# Altium PCB PCB1.PcbDoc
Units mil, origin at the board's own origin, x right, y up, seen from the top; angles counter-clockwise.
Board outline 5340 x 3480 mil, 2 copper layers (Top Layer, Bottom Layer); 76 components, 74 nets, 280 pads, 33 vias.
Unrouted connection lines stored in the file: 3.
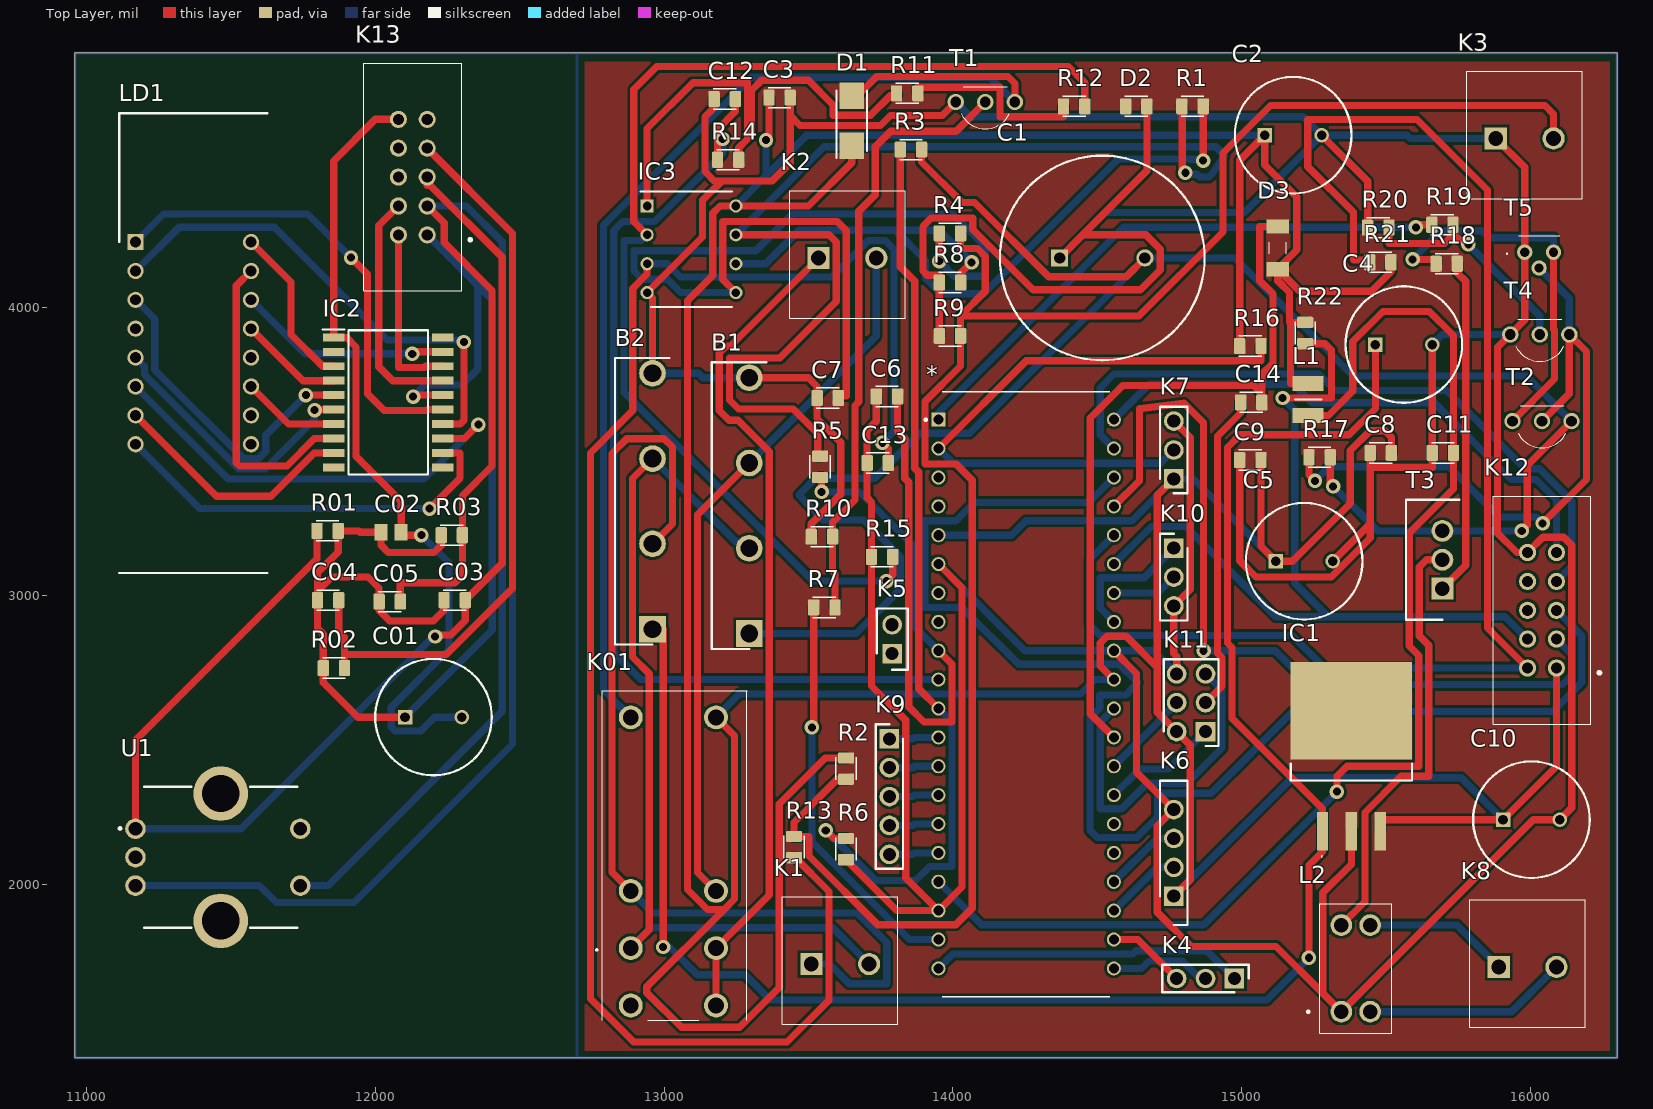
[diagram p0: Top Layer view]
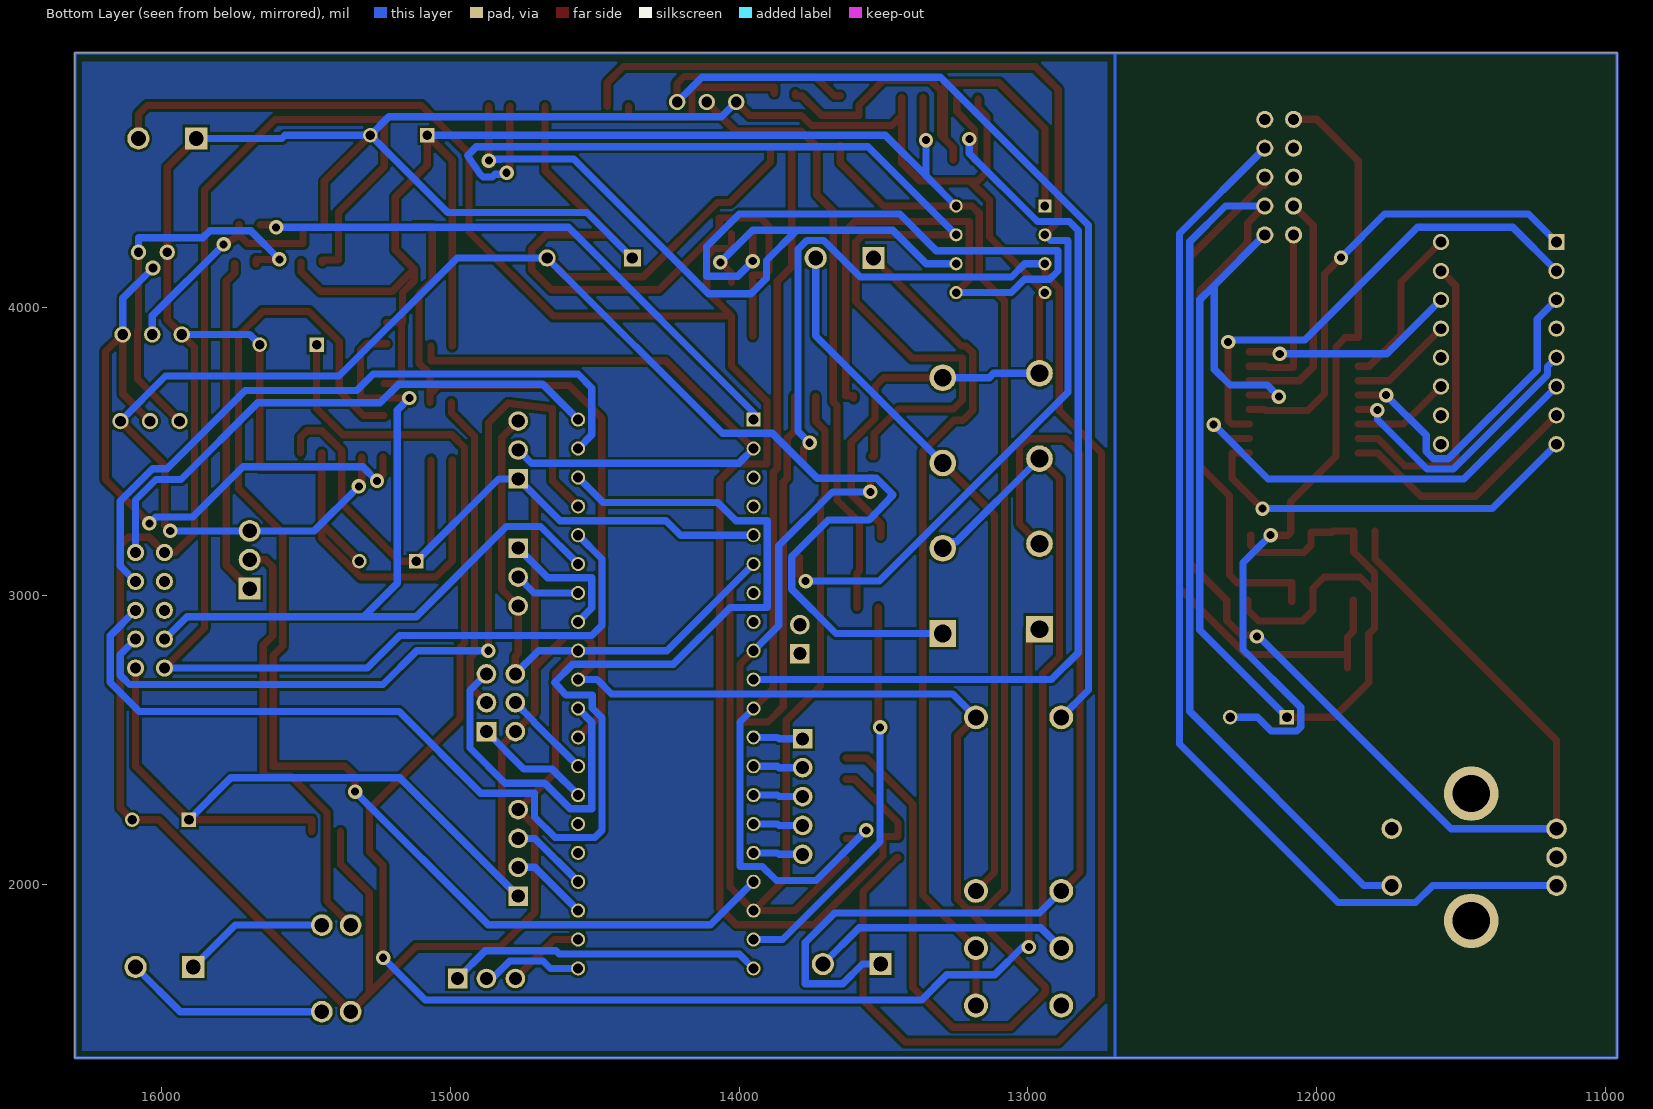
[diagram p1: Bottom Layer view, seen from below]

## Layer stack, top to bottom
Top Solder: solder mask 0.4, Solder Resist, Dk 3.5
Top Layer: signal copper 1.4
Dielectric 1: dielectric 12.6, FR-4, Dk 4.8
Bottom Layer: signal copper 1.4
Bottom Solder: solder mask 0.4, Solder Resist, Dk 3.5

## Board outline
10960,1400 10960,4880 16300,4880 16300,1400
board region "Layer Stack Region 1": 12640,4880 16300,4880 16300,1400 12640,1400
board region "Layer Stack Region 1": 12640,1400 10960,1400 10960,4880 12640,4880

## Design rules (kind name [scope] priority, off if disabled: settings)
Clearance [All] p1: gap=10 ignorepadtopadclearanceinfootprint=FALSE except(0: Arc-Hole Track-Hole SMDPad-Hole THPad-Hole Via-Hole Fill-Hole Poly-Hole Region-Hole Text-Hole)
PolygonConnect [All] p1: connectstyle=Relief reliefconductorwidth=10 reliefentries=4 polygonreliefangle="90 Angle" airgapwidth=10
RoutingVias [All] p1: holewidth=28 width=50 viastyle="Through Hole" minholewidth=28 minwidth=50 maxholewidth=28 maxwidth=50
SolderMaskExpansion [All] p1: expansion=4 istentingtop=FALSE
Width [All] p1: maxlimit=25 minlimit=25 preferedwidth=25 minimp=50.000000 maximp=50.000000 favimp=50.000000
30 further rules are at their usual default settings.

## Classes and differential pairs
component class power: B1 B2 C1 C4 C5 D1 D2 IC1 K01 K1 K2 R3 R6 R7 R10 T1
component class ic: C3 C6 C7 C12 C13 IC3 K3 K8 L2 R1 R2 R4 R5 R8 R9 R11 R12 R13 R14 R15 R17 R18 R19 R20 T2 T3 T4 T5
component class Display: C01 C02 C03 C04 C05 IC2 K13 LD1 R01 R02 R03 U1
component class "cpu sheet": * C8 C9 C10 C11 C14 D3 K4 K5 K6 K7 K9 K10 K11 K12 L1 R16 R21 R22

## Components (designator, comment, footprint, x,y, rotation, side; value= is the part's Value field where it differs from the comment)
* "ATMEGA4809-PF" DIP1543W47P254L5321H635Q40 14253.75,2660 r0 top
B1 "KBJ608G" TO750P480X2500X1900-4P 13295,2869.45 r90 top
B2 "KBJ608G" TO750P480X2500X1900-4P 12960,2884.72 r90 top
C1 "4700µ 50V" CAPPRD750W82D1800H4300 14369.72,4170 r0 top
C01 "100µ 50V" CAPPRD500W65D1025H1250 12103.15,2580 r0 top
C2 "10µ 50V" CAPPRD500W65D1025H1250 15080,4595 r0 top
C02 "100nF" *CAPC2012X94N 12055,3220 r180 top
C3 "100n" LIBRARYSOURCE=Vault 13400,4725 r0 top
C03 "10n" LIBRARYSOURCE=Vault 12275,2985 r180 top
C4 "100µ 25V" CAPPRD500W65D1025H1250 15463.15,3870 r0 top
C04 "10n" LIBRARYSOURCE=Vault 11836.81,2985 r180 top
C5 "10µ 50V" CAPPRD500W65D1025H1250 15118.15,3120 r0 top
C05 "10n" LIBRARYSOURCE=Vault 12050,2980 r180 top
C6 "10n" LIBRARYSOURCE=Vault 13771.81,3690 r0 top
C7 "10n" LIBRARYSOURCE=Vault 13566.81,3685 r0 top
C8 "100n" LIBRARYSOURCE=Vault 15481.81,3495 r0 top
C9 "100n" LIBRARYSOURCE=Vault 15030,3470 r0 top
C10 "10µ 50V" CAPPRD500W65D1025H1250 15905,2225 r0 top
C11 "100n" LIBRARYSOURCE=Vault 15696.81,3495 r0 top
C12 "10n" LIBRARYSOURCE=Vault 13210,4720 r0 top
C13 "10n" LIBRARYSOURCE=Vault 13740,3460 r0 top
C14 "100n" LIBRARYSOURCE=Vault 15033.19,3670 r0 top
D1 "1N4007" DIOM5327X242N 13650,4645 r90 top
D2 "5V1" LIBRARYSOURCE=Vault 14635,4695 r0 top
D3 "1N4148BUR" 1N4148BUR 15125,4205 r90 top
IC1 "TL780-05CKTTR" TL78005CKTTR 15380,2450 r0 top
IC2 "TM1637__SOP_" SOIC127P1045X280-20N 12045,3670 r0 top
IC3 "MCP6002-E_P" DIP781W56P254L950H533Q8N 13095,4200 r0 top
K01 "RT424615" RT424615 12884.72,2579.21 r270 top
K1 "1711725" 1711725 13510,1725 r0 top
K2 "1711725" 1711725 13535,4170 r0 top
K3 "1711725" 1711725 15880,4583.79 r0 top
K4 "10129378-903001BLF" HDRV3W67P0X254_1X3_762X241X858P 14975,1675 r180 top
K5 "10129378-902001BLF" HDRV2W67P0X254_1X2_508X241X843P 13790,2800 r90 top
K6 "UART2" HDRV4W67P0X254_1X4_1270X241X858P 14765,1960 r90 top
K7 "10129378-903001BLF" HDRV3W67P0X254_1X3_762X241X858P 14765,3405 r90 top
K8 "1711725" 1711725 15890,1715 r0 top
K9 "10129378-905001BLF" HDRV5W67P0X254_1X5_1270X241X858P 13780,2505 r270 top
K10 "UART0" HDRV3W67P0X254_1X3_762X241X858P 14765,3165 r270 top
K11 "10129381-906002BLF" HDRV6W67P254_2X3_762X483X858P 14875,2530 r90 top
K12 "N2510-6002RB-WD" N25106002RBWD 16090,2750 r90 top
K13 "N2510-6002RB-WD" N25106002RBWD 12180,4250 r90 top
L1 "CBC3225T100MR" INDC3225X270N 15230,3680 r90 top
L2 "CM2545X171B-10" CM2545X171B10 15345,1560 r0 top
LD1 "TDCG1050M" DIPS1016W75P254L4020H725Q16N 11170,4225 r0 top
R1 "CRCW08050000Z0EA" RESC2012X65N 14830,4695 r0 top
R01 "CRCW08050000Z0EA" RESC2012X65N 11835,3225 r0 top
R2 "CRCW08050000Z0EA" RESC2012X65N 13630,2401.81 r90 top
R02 "CRCW08050000Z0EA" RESC2012X65N 11856.81,2750 r180 top
R3 "CRCW08050000Z0EA" RESC2012X65N 13855,4545 r0 top
R03 "CRCW08050000Z0EA" RESC2012X65N 12265,3210 r180 top
R4 "CRCW08050000Z0EA" RESC2012X65N 13990,4255 r0 top
R5 "CRCW08050000Z0EA" RESC2012X65N 13540,3446.81 r90 top
R6 "CRCW08050000Z0EA" RESC2012X65N 13630,2123.19 r90 top
R7 "CRCW08050000Z0EA" RESC2012X65N 13555,2960 r0 top
R8 "CRCW08050000Z0EA" RESC2012X65N 13990,4085 r0 top
R9 "CRCW08050000Z0EA" RESC2012X65N 13990,3900 r0 top
R10 "CRCW08050000Z0EA" RESC2012X65N 13546.81,3205 r0 top
R11 "CRCW08050000Z0EA" RESC2012X65N 13841.81,4740 r0 top
R12 "CRCW08050000Z0EA" RESC2012X65N 14420,4695 r0 top
R13 "CRCW08050000Z0EA" RESC2012X65N 13450,2130 r90 top
R14 "CRCW08050000Z0EA" RESC2012X65N 13221.81,4510 r0 top
R15 "CRCW08050000Z0EA" RESC2012X65N 13755,3135 r0 top
R16 "CRCW08050000Z0EA" RESC2012X65N 15030,3865 r0 top
R17 "CRCW08050000Z0EA" RESC2012X65N 15270,3480 r0 top
R18 "CRCW08050000Z0EA" RESC2012X65N 15710,4150 r0 top
R19 "CRCW08050000Z0EA" RESC2012X65N 15695,4285 r0 top
R20 "CRCW08050000Z0EA" RESC2012X65N 15473.19,4275 r180 top
R21 "CRCW08050000Z0EA" RESC2012X65N 15480,4155 r0 top
R22 "CRCW08050000Z0EA" RESC2012X65N 15220,3910 r90 top
T1 "BC547ATA" TO-92_(TO-226) 14214.73,4710 r0 top
T2 "BC547ATA" TO-92_(TO-226) 16142.36,3605 r0 top
T3 "IRF9Z34NPBF" TO254P469X1042X1967-3P 15695,3025 r90 top
T4 "BC547ATA" TO-92_(TO-226) 16134.72,3905 r0 top
T5 "BC557C" BC557C 15980,4185 r0 top
U1 "PEC11R-4225F-S0024" PEC12R-4XXXF-SXXXX_1 11465,2095 r270 top

## Footprints (in the part's own frame and the unit in brackets; to place one, negate y for a bottom-side part, rotate by r counter-clockwise, add the part's x,y. Pads: shape width x height; smd on the part's side, far side on the other; paste and mask are expansions set on the pad)
1N4148BUR [mm]
  rect 1.25x2 smd: 1(-1.875,0) 2(1.875,0)
  silkscreen extent -0.5,-0.75 0.5,0.75
1711725 [mm]
  rect 1.95x1.95 hole 1.3: 1(0,0)
  round 1.95 hole 1.3: 2(5.08,0)
  silkscreen extent -2.54,-5.3 7.62,5.9, body extent -3.12,-5.3 7.61,5.9, height 18.41
*CAPC2012X94N [mm]
  rect 1.16x1.47 smd: 1(-0.88,0) 2(0.88,0)
BC557C [mm]
  round 1.35 hole 0.81: 1(0,0.127) 2(1.27,-1.27) 3(2.54,0.127)
  silkscreen extent -1.6,-0.05 3.07,1.55
CAPPRD500W65D1025H1250 [mm]
  rect 1.275x1.275 hole 0.85: 1(0,0)
  round 1.275 hole 0.85: 2(5,0)
  silkscreen extent -2.63,-5.12 7.63,5.12, body extent -2.75,-5.25 7.75,5.25, height 12.5
CAPPRD750W82D1800H4300 [mm]
  rect 1.5x1.5 hole 1: 1(0,0)
  round 1.5 hole 1: 2(7.5,0)
  silkscreen extent -5.25,-9 12.75,9, body extent -5.5,-9.25 13,9.25, height 43
CM2545X171B10 [mil]
  round 75 hole 50: 1(0,0) 2(100,0) 3(100,300) 4(0,300)
  silkscreen extent -118,-74 174,374, body extent -74,-74 174,374, height 378
DIOM5327X242N [mm]
  rect 2.3x2.15 smd: 1(-2.2,0) 2(2.2,0)
  silkscreen extent -3.27,-1.34 2.65,1.34, body extent -2.65,-1.34 2.65,1.34, height 2.42
DIP781W56P254L950H533Q8N [mm]
  rect 1.158x1.158 hole 0.758: 1(-3.905,3.81)
  round 1.158 hole 0.758: 2(-3.905,1.27) 3(-3.905,-1.27) 4(-3.905,-3.81) 5(3.905,-3.81) 6(3.905,-1.27) 7(3.905,1.27) 8(3.905,3.81)
  silkscreen extent -4.48,-5.08 3.56,5.08, body extent -4.04,-4.75 4.04,4.75, height 5.33
DIP1543W47P254L5321H635Q40 [mm]
  rect 1.24x1.24 hole 0.89: 1(-7.715,24.13)
  round 1.24 hole 0.89: 2(-7.715,21.59) 3(-7.715,19.05) 4(-7.715,16.51) 5(-7.715,13.97) 6(-7.715,11.43) 7(-7.715,8.89) 8(-7.715,6.35) 9(-7.715,3.81) 10(-7.715,1.27) 11(-7.715,-1.27) 12(-7.715,-3.81) 13(-7.715,-6.35) 14(-7.715,-8.89) 15(-7.715,-11.43) 16(-7.715,-13.97) 17(-7.715,-16.51) 18(-7.715,-19.05) 19(-7.715,-21.59) 20(-7.715,-24.13) 21(7.715,-24.13) 22(7.715,-21.59) 23(7.715,-19.05) 24(7.715,-16.51) 25(7.715,-13.97) 26(7.715,-11.43) 27(7.715,-8.89) 28(7.715,-6.35) 29(7.715,-3.81) 30(7.715,-1.27) 31(7.715,1.27) 32(7.715,3.81) 33(7.715,6.35) 34(7.715,8.89) 35(7.715,11.43) 36(7.715,13.97) 37(7.715,16.51) 38(7.715,19.05) 39(7.715,21.59) 40(7.715,24.13)
  silkscreen extent -8.93,-26.61 7.37,26.61, body extent -8.25,-26.14 8.25,26.14, height 2.03
DIPS1016W75P254L4020H725Q16N [mm]
  rect 1.425x1.425 hole 0.95: 1(0,0)
  round 1.425 hole 0.95: 2(0,-2.54) 3(0,-5.08) 4(0,-7.62) 5(0,-10.16) 6(0,-12.7) 7(0,-15.24) 8(0,-17.78) 9(10.16,-17.78) 10(10.16,-15.24) 11(10.16,-12.7) 12(10.16,-10.16) 13(10.16,-7.62) 14(10.16,-5.08) 15(10.16,-2.54) 16(10.16,0)
  silkscreen extent -1.45,-29.12 11.61,11.34
HDRV2W67P0X254_1X2_508X241X843P [mm]
  rect 1.725x1.725 hole 1.15: 1(0,0)
  round 1.725 hole 1.15: 2(2.54,0)
  silkscreen extent -1.42,-1.35 3.96,1.35, body extent -1.27,-1.2 3.81,1.2, height 8.43
HDRV3W67P0X254_1X3_762X241X858P [mm]
  rect 1.725x1.725 hole 1.15: 1(0,0)
  round 1.725 hole 1.15: 2(2.54,0) 3(5.08,0)
  silkscreen extent -1.27,-1.2 6.35,1.2, body extent -1.27,-1.2 6.35,1.2, height 8.58
HDRV4W67P0X254_1X4_1270X241X858P [mm]
  rect 1.725x1.725 hole 1.15: 1(0,0)
  round 1.725 hole 1.15: 2(2.54,0) 3(5.08,0) 4(7.62,0)
  silkscreen extent -2.54,-1.2 10.16,1.2, body extent -2.54,-1.2 10.16,1.2, height 8.58
HDRV5W67P0X254_1X5_1270X241X858P [mm]
  rect 1.725x1.725 hole 1.15: 1(0,0)
  round 1.725 hole 1.15: 2(2.54,0) 3(5.08,0) 4(7.62,0) 5(10.16,0)
  silkscreen extent -1.27,-1.2 11.43,1.2, body extent -1.27,-1.2 11.43,1.2, height 8.58
HDRV6W67P254_2X3_762X483X858P [mm]
  rect 1.725x1.725 hole 1.15: 1(0,0)
  round 1.725 hole 1.15: 2(0,2.54) 3(2.54,0) 4(2.54,2.54) 5(5.08,0) 6(5.08,2.54)
  silkscreen extent -1.27,-1.14 6.35,3.68, body extent -1.27,-1.14 6.35,3.68, height 8.58
INDC3225X270N [mm]
  rect 1.3x2.7 smd: 1(-1.4,0) 2(1.4,0)
  silkscreen extent 0,-1.15 0,1.15, body extent -1.6,-1.25 1.6,1.25, height 2.7
LIBRARYSOURCE=Vault [mm]
  rrect25% 1x1.42 smd: 1(-0.935,0) 2(0.935,0)
  silkscreen extent -1,-0.89 1,0.89
N25106002RBWD [mm]
  round 1.509 hole 0.97: 1(0,0) 2(0,2.54) 3(2.54,0) 4(2.54,2.54) 5(5.08,0) 6(5.08,2.54) 7(7.62,0) 8(7.62,2.54) 9(10.16,0) 10(10.16,2.54)
  silkscreen extent -4.93,-3.83 15.09,5.56, body extent -4.93,-3.03 15.09,5.57, height 10.14
PEC12R-4XXXF-SXXXX_1 [mm]
  round 1.8 hole 1.2: 1(-2.5,-7.5) 2(2.5,-7.5) 3(0,-7.5) 4(-2.5,7) 5(2.5,7)
  round 4.8 hole 3.28: 6(5.6,0) 7(-5.6,0)
  silkscreen extent -6.2,-8.94 6.2,6.7, body extent -7,-7.75 6.99,7.15, height 31.51
RESC2012X65N [mm]
  rrect25% 1x1.42 smd: 1(-0.935,0) 2(0.935,0)
  silkscreen extent -1,-0.89 1,0.89
RT424615 [mm]
  round 2.1 hole 1.4: 11(20.3,0) 12(15.26,0) 14(25.34,0) 21(20.3,7.5) 22(15.26,7.5) 24(25.34,7.5) A1(0,0) A2(0,7.5)
  silkscreen extent -2.35,-3.05 26.65,10.25, body extent -2.35,-2.52 26.65,10.18, height 15.8
SOIC127P1045X280-20N [mm]
  rect 1.9x0.7 smd: 1(-4.8,5.715) 2(-4.8,4.445) 3(-4.8,3.175) 4(-4.8,1.905) 5(-4.8,0.635) 6(-4.8,-0.635) 7(-4.8,-1.905) 8(-4.8,-3.175) 9(-4.8,-4.445) 10(-4.8,-5.715) 11(4.8,-5.715) 12(4.8,-4.445) 13(4.8,-3.175) 14(4.8,-1.905) 15(4.8,-0.635) 16(4.8,0.635) 17(4.8,1.905) 18(4.8,3.175) 19(4.8,4.445) 20(4.8,5.715)
  silkscreen extent -5.75,-6.35 3.5,6.42, body extent -5.23,-6.35 5.23,6.35, height 2.8
TL78005CKTTR [mm]
  rect 1x3.4 smd: 1(-2.54,-6.745) 2(0,-6.745) 3(2.54,-6.745)
  rect 10.7x8.6 smd: 4(0,3.855)
  silkscreen extent -5.33,-9 5.33,-0.8
TO254P469X1042X1967-3P [mm]
  rect 1.92x1.92 hole 1.28: 1(0,0)
  round 1.92 hole 1.28: 2(2.54,0) 3(5.08,0)
  silkscreen extent -2.73,-1.49 7.81,3.2, body extent -2.67,-1.5 7.75,3.19, height 18.84
TO750P480X2500X1900-4P [mm]
  rect 2.34x2.34 hole 1.56: 1(0,0)
  round 2.34 hole 1.56: 2(7.5,0) 3(15,0) 4(22.5,0)
  silkscreen extent -1.35,-1.5 23.85,3.3, body extent -1.25,-1.5 23.75,3.3, height 18.5
TO-92_(TO-226) [mm]
  round 1.44 hole 0.94: 1(0,0) 2(-2.6,0) 3(-5.2,0)
  silkscreen extent -4.7,-2.35 -0.5,1.34, body extent -5.67,-1.79 0.49,2.4, height 9.2

## Part data
B1 B2: "Bridge Rectifier", Manufacturer_Name="Diodes Inc.", Mouser Part Number=621-KBJ608G, Arrow Part Number=KBJ608G, Arrow Price/Stock=https://www.arrow.com/en/products/kbj608g/diodes-incorporated, Datasheet Link=https://www.diodes.com/assets/Datasheets/ds21207.pdf, Height=4.8mm, Manufacturer_Part_Number=KBJ608G, Mouser Price/Stock=https://www.mouser.co.uk/ProductDetail/Diodes-Incorporated/KBJ608G?qs=zpnZCIghiEzyVG1EfRzSrg%3D%3D
C1: library part 860010281031, "Capacitor Polarised", Manufacturer_Name="Wurth Elektronik", Mouser Part Number=710-860010281031, Datasheet Link=https://www.we-online.com/catalog/datasheet/860010281031.pdf, Height=43mm, Manufacturer_Part_Number=860010281031, Mouser Price/Stock=https://www.mouser.co.uk/ProductDetail/Wurth-Elektronik/860010281031?qs=0KOYDY2FL2%252ByBmP2PfcJMg%3D%3D
C01 C2 C4 C5 C10: library part B41851A6227M000, "Capacitor Polarised", Manufacturer_Name=TDK, Mouser Part Number=871-B41851A6227M000, Arrow Part Number=B41851A6227M000, Arrow Price/Stock=https://www.arrow.com/en/products/b41851a6227m000/epcos-tdk, Datasheet Link=https://altium.componentsearchengine.com/Datasheets/1/B41851A6227M000.pdf, Height=12.5mm, Manufacturer_Part_Number=B41851A6227M000, Mouser Price/Stock=http://www.mouser.com/Search/ProductDetail.aspx?qs=DFkWJ3l%252bHdIsXImfYI6EYQ%3d%3d
C02 C3 C03 C04 C05 C6 C7 C8 C9 C11 C12 C13 C14: library part CAP, Manufacturer="AVX Interconnect / Elco", Part Number=02015A270JAT2A
D1: "Diode", Manufacturer_Name=Shikues, Datasheet Link=https://datasheet.lcsc.com/szlcsc/SK-1N4007_C126233.pdf, Height=2.42mm, Manufacturer_Part_Number=1N4007
D2: library part ONSC-K1A2-2, "3 W Zener Voltage Regulator, 2-Pin SMB, Pb-Free, Tape and Reel", Manufacturer="On Semiconductor", PartNumber=1SMB5920BT3G, ComponentLink1Description="Manufacturer URL", ComponentLink1URL=http://www.onsemi.com/, ComponentLink2Description=Datasheet, ComponentLink2URL=http://www.onsemi.com/pub_link/Collateral/1SMB5913BT3-D.PDF, ComponentLink3Description="Package Specification", ComponentLink3URL=http://www.onsemi.com/pub_link/Collateral/1SMB5913BT3-D.PDF, DatasheetVersion="Rev. 8", Mounting Technology="Surface Mount", PackageDescription="2-Pin Small Molded Package, J-Bend Lead, Body 4.33 x 3.625 mm", PackageReference=SMB-2-403A-03_H, PackageVersion="Rev. H, 05/2011", Packing="Tape and Reel", RoHS=Pb-Free, VZ Typ (V)=6.2
D3: "Diode", Manufacturer_Name=Vishay, Datasheet Link=https://www.mouser.com/datasheet/2/427/ll4148-1767723.pdf, Height=1.6mm, Manufacturer_Part_Number=1N4148BUR
IC1: "Integrated Circuit", Manufacturer_Name="Texas Instruments", Mouser Part Number=595-TL780-05CKTTR, Arrow Part Number=TL780-05CKTTR, Arrow Price/Stock=https://www.arrow.com/en/products/tl780-05ckttr/texas-instruments?region=nac, Datasheet Link=http://www.ti.com/general/docs/suppproductinfo.tsp?distId=26&gotoUrl=http%3A%2F%2Fwww.ti.com%2Flit%2Fgpn%2Ftl780, Height=5.08mm, Manufacturer_Part_Number=TL780-05CKTTR, Mouser Price/Stock=https://www.mouser.co.uk/ProductDetail/Texas-Instruments/TL780-05CKTTR?qs=7kv20MEVUlhtPP21hgiOlA%3D%3D
IC2: "Integrated Circuit", Manufacturer_Name="TITAN MICRO ELECTRONICS", Manufacturer_Part_Number="TM1637 (SOP)", Datasheet Link=https://www.mcielectronics.cl/website_MCI/static/documents/Datasheet_TM1637.pdf, Height=2.8mm
IC3: "Integrated Circuit", Arrow Part Number=MCP6002-E/P, Manufacturer_Name=Microchip, Mouser Part Number=579-MCP6002-E/P, Arrow Price/Stock=https://www.arrow.com/en/products/mcp6002-ep/microchip-technology?region=nac, Datasheet Link=http://componentsearchengine.com/Datasheets/3/MCP6002-E_P.pdf, Height=5.334mm, Manufacturer_Part_Number=MCP6002-E/P, Mouser Price/Stock=https://www.mouser.co.uk/ProductDetail/Microchip-Technology/MCP6002-E-P?qs=hul3WK2zl4pqRWzdnAsu%2FQ%3D%3D
K01: "Relay or Contactor", Manufacturer_Name="TE Connectivity", Mouser Part Number=655-RT424615, Arrow Part Number=RT424615, Arrow Price/Stock=https://www.arrow.com/en/products/rt424615/te-connectivity?region=nac, Datasheet Link=https://componentsearchengine.com/Datasheets/1/RT424615.pdf, Height=15.7mm, Manufacturer_Part_Number=RT424615, Mouser Price/Stock=https://www.mouser.co.uk/ProductDetail/TE-Connectivity-PB/RT424615?qs=souyeP66LNEWDvmL0hcjYQ%3D%3D
K1 K2 K3 K8: "Connector", Manufacturer_Name="Phoenix Contact", Mouser Part Number=651-1711725, Arrow Part Number=1711725, Arrow Price/Stock=https://www.arrow.com/en/products/1711725/phoenix-contact?region=nac, Datasheet Link=http://www.phoenixcontact.com/de/produkte/1711725/pdf, Height=18.2mm, Manufacturer_Part_Number=1711725, Mouser Price/Stock=https://www.mouser.co.uk/ProductDetail/Phoenix-Contact/1711725?qs=F79NelsxgYFLEb9U5DotcA%3D%3D
K4 K7: "Connector", Manufacturer_Name=Amphenol, Mouser Part Number=649-1012937890301BLF, Arrow Part Number=10129378-903001BLF, Arrow Price/Stock=https://www.arrow.com/en/products/10129378-903001blf/amphenol-fci?region=nac, Datasheet Link=https://www.mouser.com/datasheet/2/18/10129378-1530218.pdf, Height=8.58mm, Manufacturer_Part_Number=10129378-903001BLF, Mouser Price/Stock=https://www.mouser.co.uk/ProductDetail/Amphenol-FCI/10129378-903001BLF?qs=0lQeLiL1qybuYTJnitumiA%3D%3D
K5: "Connector", Manufacturer_Name=Amphenol, Mouser Part Number=649-1012937890201BLF, Arrow Part Number=10129378-902001BLF, Arrow Price/Stock=https://www.arrow.com/en/products/10129378-902001blf/amphenol-fci?region=nac, Datasheet Link=https://www.mouser.co.uk/datasheet/2/18/10129378-1530218.pdf, Height=8.43mm, Manufacturer_Part_Number=10129378-902001BLF, Mouser Price/Stock=https://www.mouser.co.uk/ProductDetail/Amphenol-FCI/10129378-902001BLF?qs=0lQeLiL1qybv6C1q0T3%2FPw%3D%3D
K6: library part 10129378-904001BLF, "Connector", Manufacturer_Name=Amphenol, Mouser Part Number=649-1012937890401BLF, Arrow Part Number=10129378-904001BLF, Arrow Price/Stock=https://www.arrow.com/en/products/10129378-904001blf/amphenol-fci?region=nac, Datasheet Link=https://cdn.amphenol-icc.com/media/wysiwyg/files/drawing/10129378.pdf, Height=8.58mm, Manufacturer_Part_Number=10129378-904001BLF, Mouser Price/Stock=https://www.mouser.co.uk/ProductDetail/Amphenol-FCI/10129378-904001BLF?qs=0lQeLiL1qyYgZuNoMLioxA%3D%3D
K9: "Connector", Manufacturer_Name="FCI Electronics", Mouser Part Number=649-1012937890501BLF, Datasheet Link=https://cdn.amphenol-icc.com/media/wysiwyg/files/drawing/10129378.pdf, Height=8.58mm, Manufacturer_Part_Number=10129378-905001BLF, Mouser Price/Stock=https://www.mouser.com/Search/Refine.aspx?Keyword=649-1012937890501BLF
K10: library part 10129378-903001BLF, "Connector", Manufacturer_Name=Amphenol, Mouser Part Number=649-1012937890301BLF, Arrow Part Number=10129378-903001BLF, Arrow Price/Stock=https://www.arrow.com/en/products/10129378-903001blf/amphenol-fci?region=nac, Datasheet Link=https://www.mouser.com/datasheet/2/18/10129378-1530218.pdf, Height=8.58mm, Manufacturer_Part_Number=10129378-903001BLF, Mouser Price/Stock=https://www.mouser.co.uk/ProductDetail/Amphenol-FCI/10129378-903001BLF?qs=0lQeLiL1qybuYTJnitumiA%3D%3D
K11: "Connector", Manufacturer_Name=Amphenol, Mouser Part Number=649-1012938190602BLF, Arrow Part Number=10129381-906002BLF, Arrow Price/Stock=https://www.arrow.com/en/products/10129381-906002blf/amphenol-fci?region=europe, Datasheet Link=https://componentsearchengine.com/Datasheets/1/10129381-906002BLF.pdf, Height=8.58mm, Manufacturer_Part_Number=10129381-906002BLF, Mouser Price/Stock=https://www.mouser.co.uk/ProductDetail/Amphenol-FCI/10129381-906002BLF?qs=DXv0QSHKF4zSKXKyBbBVMw%3D%3D
K12 K13: "Connector", Manufacturer_Name=3M, Mouser Part Number=517-N2510-6002RB-WD, Arrow Part Number=N2510-6002RB-WD, Arrow Price/Stock=https://www.arrow.com/en/products/n2510-6002rb-wd/3m?region=nac, Datasheet Link=https://componentsearchengine.com/Datasheets/1/N2510-6002RB-WD.pdf, Height=10.04mm, Manufacturer_Part_Number=N2510-6002RB-WD, Mouser Price/Stock=https://www.mouser.co.uk/ProductDetail/3M-Electronic-Solutions-Division/N2510-6002RB-WD?qs=tSsi4D7a3EKnZz6HvOFNDw%3D%3D
L1: "Inductor", Manufacturer_Name="TAIYO YUDEN", Mouser Part Number=963-CBC3225T100MR, Datasheet Link=https://www.mouser.com/datasheet/2/396/wound02_e-13113-1206718.pdf, Height=2.7mm, Manufacturer_Part_Number=CBC3225T100MR, Mouser Price/Stock=https://www.mouser.co.uk/ProductDetail/Taiyo-Yuden/CBC3225T100MR?qs=I6KAKw0tg2zEtdnRpTP1sA%3D%3D
L2: "Transformer", Manufacturer_Name="Laird Technologies", Mouser Part Number=N/A, Arrow Part Number=CM2545X171B-10, Arrow Price/Stock=https://www.arrow.com/en/products/cm2545x171b-10/laird-technologies, Datasheet Link=https://datasheet.datasheetarchive.com/originals/dk/DKDS-7/122753.pdf, Height=9.5mm, Manufacturer_Part_Number=CM2545X171B-10, Mouser Price/Stock=https://www.mouser.co.uk/ProductDetail/Laird/CM2545X171B-10?qs=PzGy0jfpSMtNfkEypgU65A%3D%3D
LD1: "Display", Manufacturer_Name=Vishay, Mouser Part Number=78-TDCG1050, Arrow Part Number=TDCG1050M, Arrow Price/Stock=https://www.arrow.com/en/products/tdcg1050m/vishay?region=nac, Datasheet Link=https://www.vishay.com/docs/83180/tdcx10x0m.pdf, Height=7.25mm, Manufacturer_Part_Number=TDCG1050M, Mouser Price/Stock=https://www.mouser.co.uk/ProductDetail/Vishay-Semiconductors/TDCG1050M?qs=RzxYCzJDjPUa0IQ9xsk9iw%3D%3D
R1 R01 R2 R02 R3 R03 R4 R5 R6 R7 R8 R9 R10 R11 R12 R13 R14 R15 R16 R17 R18 R19 R20 R21 R22: library part RES, Manufacturer="Vishay Dale", Part Number=CRCW08050000Z0EA
T1 T2 T4: "Transistor BJT NPN", Manufacturer_Name="ON Semiconductor", Mouser Part Number=512-BC547ATA, Arrow Part Number=BC547ATA, Arrow Price/Stock=https://www.arrow.com/en/products/bc547ata/on-semiconductor?region=europe, Datasheet Link=https://www.onsemi.com/pub/Collateral/BC550-D.pdf, Manufacturer_Part_Number=BC547ATA, Mouser Price/Stock=https://www.mouser.co.uk/ProductDetail/ON-Semiconductor-Fairchild/BC547ATA?qs=ljbEvF4DwOMRdLfuzO8N4w%3D%3D
T3: "MOSFET (P-Channel)", Manufacturer_Name=Infineon, Mouser Part Number=942-IRF9Z34NPBF, Arrow Part Number=IRF9Z34NPBF, Arrow Price/Stock=https://www.arrow.com/en/products/irf9z34npbf/infineon-technologies-ag?region=nac, Datasheet Link=https://www.infineon.com/dgdl/irf9z34npbf.pdf?fileId=5546d462533600a40153561220af1ddd, Height=4.69mm, Manufacturer_Part_Number=IRF9Z34NPBF, Mouser Price/Stock=https://www.mouser.co.uk/ProductDetail/Infineon-IR/IRF9Z34NPBF?qs=9%252BKlkBgLFf16a%2FvlD%252BMCtQ%3D%3D
T5: "Transistor BJT PNP", Manufacturer_Name=NXP, Mouser Part Number=771-BC557C, Datasheet Link=http://uk.rs-online.com/web/p/products/1124775, Height=5.2mm, Manufacturer_Part_Number=BC557C, Mouser Price/Stock=https://www.mouser.co.uk/ProductDetail/NXP-Semiconductors/BC557C?qs=84A%2FDAdkstLO1yR4NjQrgg%3D%3D
U1: "Undefined or Miscellaneous", Manufacturer_Name=Bourns, Mouser Part Number=652-PEC11R-4225F-S24, Arrow Part Number=PEC11R-4225F-S0024, Arrow Price/Stock=https://www.arrow.com/en/products/pec11r-4225f-s0024/bourns?region=nac, Datasheet Link=https://componentsearchengine.com/Datasheets/1/PEC11R-4225F-S0024.pdf, Manufacturer_Part_Number=PEC11R-4225F-S0024, Mouser Price/Stock=https://www.mouser.co.uk/ProductDetail/Bourns/PEC11R-4225F-S0024?qs=Zq5ylnUbLm4N6UNkPX3pkQ%3D%3D

## Via types
v1: diameter 50, hole 28, Top Layer to Bottom Layer, 33 vias

## Nets (pads, with @x,y where several pads share a name; then routed paths per layer and width w, separated by ;. In a path a pad name is that pad's centre, name@x,y a point inside that pad or via, vN(x,y) a via of type N, cw(c..) or ccw(c..) an arc to the next point about the centre after c; other vN are vias at no path point)
+5: *.5 *.31 C01.1 C2.1 C02.2 C3.1 C03.2 C04.2 C5.1 C05.2 C8.2 C9.2 C10.1 D1.1 D3.1 IC1.3 IC2.16 IC3.8 K01.A2 K6.1 K7.1 K11.2 K12.1 K13.1 L1.2 R01.2 R2.2 R02.2 R03.2 R16.1 R21.2 R22.2 | length 23094.9
  Top Layer w25: C01.1 11940,2580 11820,2700 R02.2 11820,2868 11800,2888 C04.2 11800,3015 ; v1(12131,3690) 12136,3695 IC2.16 ; R03.2 12228.19,3175 12203.19,3150 12045.35,3150 12020.35,3175 C02.2 11948,3220 11943,3225 R01.2 11871.81,3151.81 11800,3080 11800,3015 ; C03.2 12238.19,2950 12201.19,2913 12050,2913 12013.19,2949.81 C05.2 12013.19,3026.81 11975,3065 11850,3065 11800,3015 ; K01.A2 13244,2515.21 13244,1950 13208,1914 ; v1(13353,4578) 13363.19,4588.19 C3.1 ; R2.2 13558,2438.62 13399,2279.62 13399,1644 13261,1506 13060,1506 12940.36,1625.64 12940.36,1646.36 13208,1914 ; D1.1 13650,4500 13500,4350 IC3.8 13193.44,4350 13168.44,4325 13168.44,4109.44 13081,4022 13081,1983 13150,1914 13208,1914 ; *.31 14510.59,2756.91 14510.59,2836.59 14534,2860 14600,2860 14708,2752 ; K6.1 14822,2017 14822,2483 K11.2 14708,2597 14708,2752 ; K7.1 14708,3348 14708,2752 ; R16.1 14993.19,4508.19 C2.1 15080,4492 15191,4381 15191,4197.18 D3.1 ; C9.2 15066.81,3171.34 C5.1 15176,3120 15376,3320 15376,3503 15445,3572 15496,3572 15518.62,3549.38 C8.2 ; R22.2 15169,3946.81 ; L1.2 15169,3735.12 15169,3946.81 ; IC1.3 15480,2225 C10.1 16090,2410 K12.1 ; R21.2 15516.81,4121.81 15450,4055 15201.18,4055 D3.1 ; D3.1 15125,4091 15166,4050 15166,3946.81 15169,3946.81
  Bottom Layer w25: C01.1 12405,2881.85 12405,4025 12355,4075 ; v1(12131,3690) 12171,3730 12300,3730 12355,3785 12355,4075 ; K13.1 12355,4075 ; K01.A2 13260.79,2660 14441.72,2660 14491.72,2710 *.31 ; IC3.8 13353,4454.26 ; v1(13353,4578) 13353,4454.26 ; *.5 14203,3210 14253,3260 14620,3260 K7.1 14833.15,3405 C5.1 ; K6.1 15175,2370 15760,2370 C10.1 ; C2.1 13493.74,4595 13353,4454.26
+VIN: B1.1 C1.2 R3.2 R17.2 T2.1 T3.3 | length 6670.5
  Top Layer w25: R3.2 13891.81,4502.19 14032.19,4361.81 14075.05,4361.81 14331.86,4105 14600,4105 C1.2 ; R17.2 15306.81,3389.19 v1(15317,3379) ; v1(15970,3225) 15988.6,3243.6 15988.6,3451.24 T2.1
  Bottom Layer w25: B1.1 13664.45,2869.45 13818,3023 13818,3136 13691.5,3262.5 13550,3262.5 13467,3350 13524.5,3407.5 13729.5,3407.5 13885,3563 14058,3563 C1.2 14976.12,4170 15385.12,3761 15986.36,3761 T2.1 ; v1(15317,3379) 15471,3225 T3.3 v1(15970,3225)
GND: *.6 *.18 *.32 B1.4 B2.4 C1.1 C01.2 C02.1 C2.2 C3.2 C4.2 C5.2 C6.1 C7.1 C8.1 C9.1 C10.2 C11.1 C12.1 C13.1 D2.2 IC1.2 IC2.1 IC3.4 K3.1 K6.4 K7.3 K10.3 K11.6 K12.10 K13.10 L2.1 R6.1 R8.1 R9.1 R10.1 R15.1 R20.2 T1.3 T4.3 T5.1 | length 25961.2
  Top Layer w25: K13.10 12000,4650 11856.02,4506.02 IC2.1 11900,3895 11933,3862 11933,3483.65 12089.65,3327 C02.1 12099.65,3210 v1(12160,3210) ; B2.4 12960,4031.26 IC3.4 13133.44,4242.18 13133.44,4369.44 13200,4436 ; C12.1 13173.19,4690.19 13142,4659 13142,4469 13175,4436 13200,4436 ; B1.4 13500,3755.28 13530,3725.28 C7.1 13530,3614 13612,3532 13612,3352 13510,3250 R10.1 ; C3.2 13436.81,4663 ; R6.1 13806.38,1910 *.18 ; C6.1 13735,3604.81 13703.19,3573 C13.1 13703.19,3339.55 13718.19,3324.55 R15.1 13718.19,2687.81 13837,2569 13837,2023 *.18 ; *.6 14031.91,3028.09 14031.91,1991.91 *.18 ; R9.1 R8.1 13953.19,4109.79 13911,4109.79 13896.36,4124.43 13896.36,4279.36 13925,4308 14069,4308 14069,4268.31 14277.31,4060 14650,4060 14718,4128 14718,4200 14668,4250 14449.72,4250 ; T1.3 13963,4663 13783.99,4663 13749.82,4628.84 13470.97,4628.84 13436.81,4663 ; C1.1 14449.72,4250 ; *.32 14636,2731.5 14636,2389 K6.4 14708,2203 14708,1904 14826,1786 15119,1786 15281,1624 ; D2.2 14671.81,4472.09 14449.72,4250 ; K7.3 14822,3548 14822,3022 K10.3 14765,2800 14775,2790 K11.6 ; C9.1 14993.19,3121.81 15050,3065 15310,3065 15445,3200 15445,3250 ; C2.2 15436.38,4435.47 R20.2 ; C5.2 15445,3250 ; IC1.2 15380,2071 15281,1972 15281,1624 ; C8.1 15445,3444 ; C4.2 C11.1 15660,3444 15445,3444 ; K3.1 15980,4483.79 T5.1 15980,3955 T4.3 15886,3861 15886,3217 15953,3150 K12.10 16043,3203 16115,3203 16143,3175 16143,2266.15 C10.2 16010,2225 L2.1 15281,1624 ; 13200,4436 13372.81,4436 13436.81,4500 13436.81,4663 ; 15445,3250 15445,3444
  Bottom Layer w25: v1(12160,3210) 12255,3115 12255,2813.87 12055.55,2614.42 12055.55,2545.58 12068.73,2532.4 12157.16,2532.4 12204.76,2580 C01.2 ; B2.4 13119,3770.55 13134.28,3755.28 B1.4 ; *.6 14250,2810 *.32 14695,2810 K11.6 ; T1.3 14061,4659 15212.85,4659 C2.2 ; C1.1 14526.72,4327 15008.85,4327 C2.2 ; C4.2 15695,3905 T4.3 ; K3.1 15583.21,4583.79 15572,4595 C2.2
Net*_1: *.1 R19.1 | length 2002.4
  Top Layer w25: v1(15603,4276) 15612,4285 R19.1
  Bottom Layer w25: *.1 13950,3635 14591,4276 v1(15603,4276)
Net*_2: *.2 K7.2 R16.2 | length 2148.9
  Top Layer w25: *.2 14254,3814 15066.81,3814 R16.2
  Bottom Layer w25: *.2 14001,3459 14719,3459 K7.2
Net*_7: *.7
Net*_8: *.8
Net*_9: *.9 C6.2 R5.1 | length 2378.1
  Top Layer w25: R5.1 13545.44,3410 v1(13545.44,3360) ; C6.2 13808.62,3570.33 13833.09,3545.86 13833.09,3407 13847,3393.09 13847,2616.09 13900,2563.09 13996.91,2563.09 13996.91,2763.09 *.9
  Bottom Layer w25: v1(13545.44,3360) 13677,3360 13863,3174 13863,2897 *.9
Net*_10: *.10 C12.2 R14.1 | length 3423.4
  Top Layer w25: R14.1 13185,4564 ; v1(13203,4582) 13185,4564 ; C12.2 13246.81,4676.81 13185,4615 13185,4564
  Bottom Layer w25: v1(13203,4582) 13203,4532 12967,4296 12856.67,4296 12825.96,4265.3 12825.96,2803.04 12919,2710 *.10
Net*_11: *.11 D2.1 R3.1 R6.2 | length 3167
  Top Layer w25: v1(13560,2188) 13588,2160 R6.2 ; R3.1 13818.19,4139.33 13868.09,4089.43 13868.09,3442 13882,3428.09 13882,2678 *.11
  Bottom Layer w25: v1(13560,2188) 13734,2014 13871,2014 13920,2063 13997,2063 13997,2563 *.11
Net*_12: *.12 K9.1 | length 172.1
  Bottom Layer w25: K9.1 13862,2505 13867,2510 *.12
Net*_13: *.13 K9.2 | length 172.1
  Bottom Layer w25: K9.2 13862,2405 13867,2410 *.13
Net*_14: *.14 K9.3 | length 172.1
  Bottom Layer w25: K9.3 13862,2305 13867,2310 *.14
Net*_15: *.15 K9.4 | length 172.1
  Bottom Layer w25: K9.4 13862,2205 13867,2210 *.15
Net*_16: *.16 K9.5 | length 172.1
  Bottom Layer w25: K9.5 13862,2105 13867,2110 *.16
Net*_17: *.17 C11.2 L1.1 | length 4340.2
  Top Layer w25: L1.1 15300.88,3624.88 15385,3709 15385,3881 15489,3985 15650,3985 15733.62,3901.38 C11.2 15733.62,3371 15580,3217.38 15580,2826.69 15613.13,2793.56 15613.13,2409.98 15364.98,2409.98 15330,2375 v1(15330,2322)
  Bottom Layer w25: *.17 14099,1861 14869,1861 v1(15330,2322)
Net*_19: *.19 R7.1 | length 1392.6
  Top Layer w25: v1(13512,2544.62) 13518.19,2550.81 R7.1
  Bottom Layer w25: v1(13512,2544.62) 13512,2148 13850,1810 *.19
Net*_20: *.20 K4.1 | length 1090
  Bottom Layer w25: *.20 14000,1760 14623,1760 14634,1771 14879,1771 K4.1
Net*_21: *.21 K4.2 | length 353.5
  Bottom Layer w25: *.21 14653,1710 14679,1736 14794,1736 14855,1675 K4.2
Net*_22: *.22 K4.3 | length 273.4
  Top Layer w25: *.22 14640,1810 K4.3
Net*_23: *.23 K6.2 | length 269.6
  Bottom Layer w25: *.23 14707.5,2060 K6.2
Net*_24: *.24 K6.3 | length 269.6
  Bottom Layer w25: *.24 14707.5,2160 K6.3
Net*_27: *.27 K11.1 | length 408.6
  Bottom Layer w25: *.27 14647.5,2400 14745,2400 K11.1
Net*_28: *.28 K11.4 | length 310.1
  Bottom Layer w25: *.28 14710,2562.5 14710,2565 K11.4
Net*_29: *.29 C14.2 D3.2 | length 2498.1
  Top Layer w25: *.29 14475.59,2591.91 14475.59,3615.59 14588,3728 15042,3728 15070,3700 ; C14.2 15070,3700 ; D3.2 15063,4278.82 15063,4090.78 15109,4044.78 15109,3806 15070,3767 15070,3700
Net*_30: *.30 K11.5 | length 1156.3
  Bottom Layer w25: *.30 14510,2562.5 14510,2263 14585.08,2263 14673.54,2351.46 14810.46,2351.46 14932,2473 14932,2673 K11.5
Net*_33: *.33 K10.1 | length 469.9
  Bottom Layer w25: *.33 14510,2957.5 14510,3063 14663,3063 K10.1
Net*_34: *.34 K10.2 | length 230.3
  Bottom Layer w25: *.34 14710,3010 K10.2
Net*_35: *.35 K12.4 R22.1 | length 2905.1
  Top Layer w25: v1(15142,3685) 15311,3685 15311,3850.19 15288,3873.19 R22.1
  Bottom Layer w25: *.35 14687.5,3240 14806,3240 15118,2928 15300,2928 ; v1(15142,3685) 15184,3643 15184,3044 15300,2928 ; K12.4 15912,2928 15300,2928
Net*_36: *.36 K12.2 R21.1 | length 4973.7
  Top Layer w25: R21.1 15443.19,4163 15387,4163 15387,4328 15229,4486 15229,4649 15607,4649 15851,4405 15851,2889 K12.2
  Bottom Layer w25: *.36 14475,3127.5 14475,2898.09 14510,2863.09 15174.91,2863.09 15288,2750 K12.2
Net*_37: *.37 K12.3 | length 2898.7
  Top Layer w25: *.37 14646,3398.5 14646,3648 14800,3667 14868,3599 v1(14868,2810)
  Bottom Layer w25: v1(14868,2810) 15116,2810 15233,2693 16111,2693 16143,2725 16143,2797 K12.3
Net*_38: *.38 K12.5 | length 4762.7
  Bottom Layer w25: *.38 14470.5,3323 14074,3323 14011,3260 13903,3260 13903,2960 14031,2960 14228,2763 14576,2763 14639,2700 14600,2656.91 14509,2656.91 14509,2612 14475,2578 14475,2188 14500,2163 14637,2163 14708.54,2234.54 14708.54,2316.46 14894.46,2316.46 15178,2600 16078,2600 16178,2700 16178,2862 K12.5
Net*_39: *.39 K12.7 | length 2365.2
  Bottom Layer w25: *.39 14510,3557.5 14510,3720 14557.97,3767.97 15267.03,3767.97 15324,3711 15710.03,3711 15980.99,3440.04 16031.7,3440.04 16143,3328.74 16143,3103 K12.7
Net*_40: *.40 K12.9 | length 1931.5
  Bottom Layer w25: *.40 14680.47,3732.97 15178.95,3732.97 15243.21,3668.72 15666.97,3668.72 15932.69,3403 16019,3403 16090,3332 K12.9
NetB1_2: B1.2 B2.3 K1.2 K01.11 | length 3158.1
  Top Layer w25: K01.11 12949,1844.28 12949,2730 12891,2788 12891,3406.28 B2.3
  Bottom Layer w25: K01.11 12955.72,1851 13584,1851 K1.2 ; B2.3 13248.28,3187 13295,3187 B1.2
NetB1_3: B1.3 K01.22 K2.2 | length 2474.5
  Top Layer w25: K01.22 13116,2042.43 13116,3281 B1.3
  Bottom Layer w25: B1.3 13735,3900 K2.2
NetB2_1: B2.1 C4.1 IC1.1 | length 6221.7
  Top Layer w25: B2.1 12997,2884.72 v1(12997,1784) ; v1(15233,1747) 15233,2067 15280,2114 IC1.1 15280,2263 14966.46,2576.54 14966.46,2821.46 14951,2836.92 14951,3514 14995,3558 15372,3558 15463.15,3649.15 C4.1
  Bottom Layer w25: v1(12997,1784) 13019,1784 13115,1688 13281,1688 13368,1601 15087,1601 v1(15233,1747)
NetB2_2: B2.2 K1.1 K01.12 | length 3539.5
  Top Layer w25: K01.12 12820,2043.15 12820,3493 12871,3544 13000,3544 13029,3515 13029,3249 B2.2
  Bottom Layer w25: K01.12 12961.15,1902 13669,1902 13771,1800 13771,1657 13641,1657 13573,1725 K1.1
NetC03_1: C03.1 K13.5 R01.1 U1.1 | length 4434.5
  Top Layer w25: U1.1 11169.72,2499.72 11798.19,3128.19 R01.1 ; K13.5 12180,4421 12190.73,4421 12439.5,4172.23 12439.5,3112.69 C03.1 12311.81,2915 12260.78,2863.97 12212.28,2863.97 v1(12207.5,2859.19)
  Bottom Layer w25: U1.1 11535.24,2193.43 12201,2859.19 v1(12207.5,2859.19)
NetC04_1: C04.1 K13.7 R02.1 U1.2 | length 6307.8
  Top Layer w25: C04.1 11873.62,2877 11893.62,2857 11893.62,2797 ; R02.1 11893.62,2797 ; K13.7 12475,4255 12475,3026 12246,2797 11893.62,2797
  Bottom Layer w25: U1.2 11599.43,1996.57 11658,1938 11926,1938 12475,2487 12475,4255 K13.7
NetC05_1: C05.1 K13.3 R03.1 U1.5 | length 4591.5
  Top Layer w25: C05.1 12086.81,3045 12275,3045 12301.81,3071.81 R03.1 12301.81,3346.65 12404.5,3449.34 12404.5,4057.72 12238.57,4223.65 12238.57,4291.43 K13.3
  Bottom Layer w25: U1.5 11836.57,1996.57 12440,2600 12440,4226 12316,4350 K13.3
NetC7_2: C7.2 IC3.5 R4.1 | length 3462.6
  Top Layer w25: IC3.5 13203.44,4095.3 13203.44,4296 13600,4296 13631,4265 13631,3693 13603.62,3693 C7.2 ; v1(13953,4159) 13953.19,4159.19 R4.1
  Bottom Layer w25: IC3.5 13058,4050 13012,4096 12924.96,4096 12895.96,4125 12895.96,4195.3 13317.3,4195.3 13444,4322 14000,4322 14113,4209 14113,4107 14005,4107 v1(13953,4159)
NetC13_2: C13.2 IC3.3 R13.1 | length 5824.5
  Top Layer w25: IC3.3 12941.26,4114.06 12891.44,4064.23 12891.44,3641.44 12745,3495 12745,1605 12895,1455 13426,1455 13571,1600 13571,1976.19 13454,2093.19 R13.1 ; v1(13756,3530) 13776.81,3509.19 C13.2
  Bottom Layer w25: IC3.3 13011.26,4150 13057.26,4104 13581,4104 13707.89,4230.89 13765.11,4230.89 13796,4200 13796,3570 v1(13756,3530)
NetC14_1: C14.1 K11.3 | length 1103.1
  Top Layer w25: K11.3 14931.46,2686.46 14931.46,2786 14916,2801.46 14916,3552.64 14996.38,3633.01 C14.1
NetD1_2: D1.2 K01.A1 T1.1 | length 4082.4
  Top Layer w25: D1.2 13670,4731.61 13736.39,4798 14190.77,4798 14215,4773.77 14215,4710 T1.1
  Bottom Layer w25: K01.A1 12790,2673.94 12790,4283 13303,4796 14128.73,4796 T1.1
NetIC2_3: IC2.3 LD1.16 | length 570.7
  Top Layer w25: LD1.16 11708,4087 11708,3905 11818,3795 IC2.3
NetIC2_4: IC2.4 LD1.13 | length 360.6
  Top Layer w25: LD1.13 11750,3745 IC2.4
NetIC2_5: IC2.5 LD1.3 | length 1141.3
  Top Layer w25: v1(11760,3695) IC2.5
  Bottom Layer w25: LD1.3 11236.69,3958.31 11236.69,3782.31 11544.55,3474.45 11595.45,3474.45 11621,3500 11621,3556 v1(11760,3695)
NetIC2_6: IC2.6 LD1.5 | length 966
  Top Layer w25: v1(11790,3643) 11792,3645 IC2.6
  Bottom Layer w25: LD1.5 11201,3794 11201,3766 11527.55,3439.45 11618.45,3439.45 11790,3611 v1(11790,3643)
NetIC2_7: IC2.7 LD1.11 | length 339.9
  Top Layer w25: LD1.11 11700,3595 IC2.7
NetIC2_8: IC2.8 LD1.15 | length 1066.1
  Top Layer w25: LD1.15 11519,4074 11519,3461 11530,3450 11694,3450 11789,3545 IC2.8
NetIC2_9: IC2.9 LD1.7 | length 864.1
  Top Layer w25: LD1.7 11450,3345 11639,3345 11789,3495 IC2.9
NetIC2_12: IC2.12 LD1.8 | length 1407.1
  Top Layer w25: v1(12187.88,3302) 12293.88,3408 12293.88,3495 IC2.12
  Bottom Layer w25: LD1.8 11393,3302 v1(12187.88,3302)
NetIC2_13: IC2.13 LD1.6 | length 1540.8
  Top Layer w25: IC2.13 12309,3545 v1(12357,3593)
  Bottom Layer w25: LD1.6 11490.55,3404.45 12168.45,3404.45 v1(12357,3593)
NetIC2_14: IC2.14 LD1.2 | length 1713.4
  Top Layer w25: IC2.14 12294,3595 12307,3608 v1(12307,3879)
  Bottom Layer w25: LD1.2 11321,4276 11651,4276 12041.5,3885.5 12300.5,3885.5 v1(12307,3879)
NetIC2_15: IC2.15 LD1.1 | length 1629.6
  Top Layer w25: v1(11916,4171) 11973,4114 11973,3700 12031,3642 12179,3642 12182,3645 IC2.15
  Bottom Layer w25: LD1.1 11267,4322 11765,4322 v1(11916,4171)
NetIC2_17: IC2.17 K13.4 | length 826.8
  Top Layer w25: K13.4 12011.95,4281.95 12011.95,3793.42 12060.37,3745 IC2.17
NetIC2_18: IC2.18 K13.2 | length 615.5
  Top Layer w25: K13.2 12080,3790.37 12170.37,3790.37 12175,3795 IC2.18
NetIC2_19: IC2.19 LD1.14 | length 744.3
  Top Layer w25: v1(12128,3838) 12135,3845 IC2.19
  Bottom Layer w25: LD1.14 11757,3838 v1(12128,3838)
NetIC3_1: IC3.1 R11.1 R14.2 | length 1759.2
  Top Layer w25: IC3.1 12941.26,4618.26 13100,4777 13289,4777 13289,4582 ; R14.2 13258.62,4551.62 13289,4582 ; R11.1 13805,4732 13782.99,4732 13714.82,4663.84 13585.18,4663.84 13585.18,4700 13500.18,4785 13338,4785 13303,4750 13303,4596 13289,4582
NetIC3_2: IC3.2 R12.2 R15.2 | length 4109
  Top Layer w25: IC3.2 12895,4296.26 12895,4753 12975,4833 14400.81,4833 14456.81,4777 R12.2 ; v1(13770,3051) 13791.81,3072.81 R15.2
  Bottom Layer w25: IC3.2 12921.56,4230.3 12860.96,4230.3 12860.96,3705.04 13515,3051 v1(13770,3051)
NetIC3_6: IC3.6 R1.2 R8.2 | length 2572.9
  Top Layer w25: R8.2 14026.81,4116.62 v1(14065,4154.81) ; v1(14866.81,4507) R1.2
  Bottom Layer w25: IC3.6 13352.08,4150 13467.97,4265.89 13800.11,4265.89 ; v1(14065,4154.81) 13953.93,4265.89 13800.11,4265.89 ; v1(14866.81,4507) 14862.03,4511.78 14825.39,4511.78 14824.68,4512.5 14572.5,4512.5 14106,4046 13959,4046 13905,4100 13905,4161 13800.11,4265.89
NetIC3_7: IC3.7 R1.1 R5.2 | length 3844.9
  Top Layer w25: IC3.7 13571,4250 13596,4225 13596,4019 13401,3824 13226.44,3824 13226.44,3678 13257.44,3647 13447,3647 13532,3562 13532,3483.62 R5.2 ; R1.1 14794.09,4694.1 14794.09,4482.67 14805,4471.76 v1(14805,4465)
  Bottom Layer w25: IC3.7 13553.74,4555 14910,4555 14940,4525 14897.42,4461.13 14886.29,4450 14876.62,4450 14854.64,4450 14844.43,4460.22 14809.78,4460.22 v1(14805,4465)
NetK01_21: K01.21 K01.24 K2.1 | length 2905.4
  Top Layer w25: K01.24 K01.21 13364,1964 13364,3500 13256,3608 13225,3608 13191.44,3641.56 13191.44,3841.56 13215.28,3865.4 13230.4,3865.4 K2.1
NetK3_2: K3.2 R2.1 R4.2 R9.2 R13.2 | length 6333.2
  Top Layer w25: R2.1 13600,2365 13450,2215 R13.2 13502.19,2166.81 13502.19,2098.81 13740,1861 14010,1861 14067,1918 14067,3400 14010,3457 13903.09,3457 13903.09,3672.1 14026.81,3795.82 R9.2 14026.81,3968.81 ; R4.2 14026.81,4202.31 14085.19,4202.31 14112.5,4175 14112.5,4054.5 14026.81,3968.81 ; K3.2 16080,4668 16050,4698 15100,4698 14935,4533 14935,4260 14643.81,3968.81 14026.81,3968.81
NetK8_1: K8.1 L2.3 | length 505.1
  Bottom Layer w25: L2.3 15745,1860 K8.1
NetK8_2: K8.2 L2.2 | length 709.2
  Bottom Layer w25: L2.2 15935,1560 K8.2
NetL2_4: L2.4 T3.2 | length 1526
  Top Layer w25: L2.4 15427,1942 15427,2250 15551.98,2374.98 15648.13,2374.98 15648.13,2828.56 15615,2861.69 15615,3100 15640,3125 T3.2
NetR7_2: R7.2 R10.2 T1.2 | length 2105
  Top Layer w25: R7.2 13591.81,3078 13583.62,3086.19 R10.2 13583.62,3254.62 13661,3332 13661,3659 13674,3672 13674,4332 13731,4389 13731,4555 13785,4609 14011.36,4609 T1.2
NetR11_2: R11.2 R12.1 | length 663.6
  Top Layer w25: R11.2 13878.62,4761 14163.55,4761 14163.55,4659 14383.19,4659 R12.1
NetR17_1: R17.1 T2.2 T4.1 T5.2 | length 2334.2
  Top Layer w25: R17.1 15233.19,3418.81 v1(15254,3398) ; T2.2 16134.72,3699.72 T4.1 16194,3845.72 16194,3403 v1(16042,3251)
  Bottom Layer w25: v1(15254,3398) 15303,3447 15718,3447 15892,3273 16020,3273 v1(16042,3251) ; T5.2 16134.72,4030.28 T4.1
NetR18_1: R18.1 T2.3 T5.3 | length 1332.5
  Top Layer w25: v1(15592,4165) 15673.19,4165 R18.1 ; T2.3 16083.54,3750.91 16083.54,3919.46 16080,3923 T5.3
  Bottom Layer w25: v1(15592,4165) 15691.5,4264.5 15832.5,4264.5 15857,4240 16080,4240 T5.3
NetR18_2: R18.2 T3.1 | length 1170.6
  Top Layer w25: T3.1 15776,3106 15776,4089 15746.81,4118.19 R18.2
NetR19_2: R19.2 R20.1 T4.2 | length 838.3
  Top Layer w25: R20.1 15510,4220 15701.81,4220 15730.31,4248.5 ; v1(15785,4217) 15730.31,4248.5 ; 15730.31,4248.5 15731.81,4250 R19.2 15730.31,4248.5
  Bottom Layer w25: v1(15785,4217) 16032.36,3969.64 T4.2
pads on no net: *.3 *.4 *.25 *.26 IC1.4 IC2.2 IC2.10 IC2.11 IC2.20 K01.14 K5.1 K5.2 K12.6 K12.8 K13.6 K13.8 K13.9 LD1.4 LD1.9 LD1.10 LD1.12 U1.3 U1.4 U1.6 U1.7
copper on no net: | length 28076.9
  Bottom Layer w10: 10960,1400 12698.44,1400 12698.44,4880 10960,4880 ; 10960,1400 10960,4880 ; 10960,1400 16300,1400 16300,4880 10960,4880 ; 10960,1400 10960,4880

## Polygon pours and split planes (outlines as drawn)
no net on Multi-Layer "NONET_L-01_P-001" (solid): 12725,1425 12725,4850 16275,4850 16275,1425